# EAGLE board supply LF (EAGLE 9.6.2)
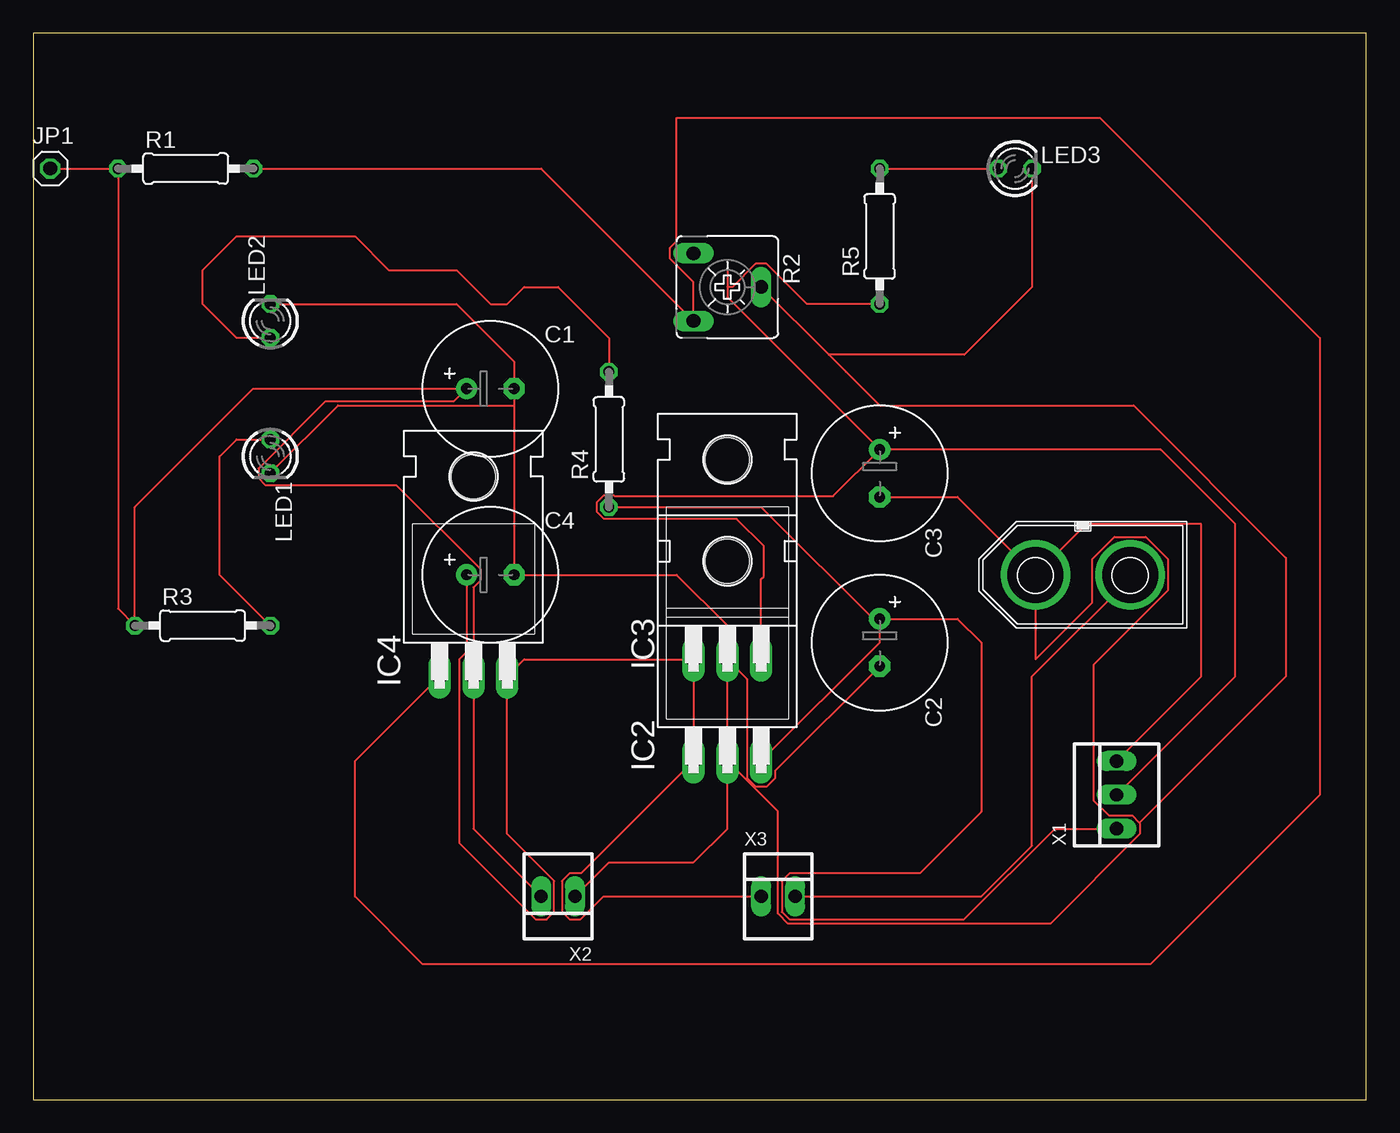
[diagram p0: board, top side]

Size 100 x 80 mm. Coordinates in mm from the lower left corner, seen from the top.
Outline: 0,0 100,0 100,80 0,80 0,0
Copper layers (1*16): Top 0.035mm / dielectric 1.5mm / Bottom 0.035mm
Design rules "default": minimum track width 6mil, minimum drill 0.35mm, track to track 6mil, track to pad 6mil, pad to pad 6mil, via to via 6mil, smd to smd 6mil, copper to edge 40mil, drill to drill 6mil, minimum pad ring 10mil, minimum via ring 8mil, stop-mask expansion 4mil, vias tented up to drill 0mil, thermal gap 10mil

## Footprints (pad centres in the part's own frame; a part is rotated, then mirrored left to right if it is on the bottom)
E3,5-10 = drill 0.813 pad 1.6: + -1.778,0 | drill 0.813 pad 1.6 octagon: - 1.778,0
TO220H = drill 1.118 long: 1 -2.54,-10.16; 2 0,-10.16; 3 2.54,-10.16 | hole 3.302: 0,4.826
1X01 = drill 1.016 octagon: 1 0,0
LED3MM = drill 0.813 octagon: A -1.27,0; K 1.27,0
0207/10 = drill 0.813 octagon: 1 -5.08,0; 2 5.08,0
CA6V = drill 1.016 long: A -2.54,-2.54; E 2.54,-2.54; S 0,2.54
CON-XT60M = drill 4.2: V+ -3.55,0; V- 3.55,0
22-23-2031 = drill 1 long: 1 -2.54,0; 2 0,0; 3 2.54,0
22-23-2021 = drill 1 long: 1 -1.27,0; 2 1.27,0

## Placement (x,y rotation side)
C1  1000uF/16V  [E3,5-10]  34.29,53.34 0 top
C2  1000uF/16V  [E3,5-10]  63.5,34.29 270 top
C3  1000uF/16V  [E3,5-10]  63.5,46.99 270 top
C4  1000uF/16V  [E3,5-10]  34.29,39.37 0 top
IC2  7805T  [TO220H]  52.07,35.56 0 top
IC3  7805T  [TO220H]  52.07,43.18 0 top
IC4  317T  [TO220H]  33.02,41.91 0 top
JP1  [1X01]  1.27,69.85 0 top
LED1  [LED3MM]  17.78,48.26 270 top
LED2  [LED3MM]  17.78,58.42 90 top
LED3  [LED3MM]  73.66,69.85 0 top
R1  1K2  [0207/10]  11.43,69.85 0 top
R2  20K  [CA6V]  52.07,60.96 270 top
R3  1K  [0207/10]  12.7,35.56 0 top
R4  1K  [0207/10]  43.18,49.53 90 top
R5  1K  [0207/10]  63.5,64.77 90 top
VIN  [CON-XT60M]  78.74,39.37 180 top
X1  VSYS  [22-23-2031]  81.28,22.86 90 top
X2  VMOT  [22-23-2021]  39.37,15.24 180 top
X3  switch  [22-23-2021]  55.88,15.24 0 top

## Library data of the parts
C1-C4 R1 R3-R5 = rcl
IC2-IC4 = linear
JP1 = pinhead
LED1-LED3 = led
R2 = pot
VIN = con-XT60M
X1 = con-molex; MF: MOLEX; MPN: 22-23-2031; OC_FARNELL: 1462950; OC_NEWARK: 30C0862
X2 X3 = con-molex; MF: MOLEX; MPN: 22-23-2021; OC_FARNELL: 1462926; OC_NEWARK: 25C3832

## Nets
+12V: C3.+ IC3.3 R5.1 X1.2
GND: C1.- C2.- C3.- C4.- IC2.2 IC3.2 LED1.K LED2.K LED3.K R2.S VIN.V- X1.3 X2.1
N$1: IC4.1 R1.2 R2.E
N$2: LED1.A R3.2
N$3: LED3.A R5.2
N$4: VIN.V+ X3.2
N$5: LED2.A R4.2
VCC: C2.+ IC2.3 R4.1 X1.1
VDD: C1.+ IC4.2 JP1.1 R1.1 R3.1 X2.2
VPP: C4.+ IC2.1 IC3.1 IC4.3 X3.1

## Tracks (layer width: path | path; a pad name or v marks a point on that pad's centre or on a via)
+12V
  Top 0.152: IC3.3 54.61,39.05 54.81,39.25 54.81,41.52 52.77,43.56 42.81,43.56 42.29,44.08 42.29,44.82 42.81,45.34 43.55,45.34 43.62,45.26 59.99,45.26 C3.+ | X1.2 90.17,31.75 90.17,43.18 84.58,48.77 C3.+ | R5.1 60.96,59.69 59.69,59.69 58.04,59.69 55.02,62.71 54.2,62.71 52.45,60.96 52.07,60.96 | 52.07,62.23 52.07,60.96 | 52.07,60.96 52.07,60.2 C3.+
GND
  Top 0.152: LED2.K 31.75,59.69 36.07,55.37 C1.- 36.07,52.07 | 36.07,52.07 C4.- 48.26,39.37 52.07,35.56 IC3.2 | IC2.2 IC3.2 | X2.1 43.18,17.78 49.53,17.78 52.07,20.32 IC2.2 | LED1.K 22.86,52.07 36.07,52.07 | VIN.V- 75.19,33.02 79.45,37.28 79.45,40.55 81.11,42.21 83.47,42.21 85.13,40.55 85.13,38.2 79.54,32.61 79.54,22.45 80.69,21.3 82.44,21.3 82.99,20.76 | C3.- 69.35,45.21 VIN.V- | C2.- 55.68,24.69 55.68,24.12 55.05,23.5 54.17,23.5 53.54,24.12 53.54,31.55 IC3.2 | X1.3 87.63,31.75 87.63,43.18 79,43.18 VIN.V- | 82.99,20.76 83.02,20.73 83.02,19.91 76.3,13.2 56.62,13.2 55.86,13.95 55.86,21.61 IC2.2 | R2.S 59.69,55.88 | 59.69,55.88 60.96,54.61 63.5,52.07 82.55,52.07 93.98,40.64 93.98,31.75 82.99,20.76 | LED3.K 74.93,60.96 69.85,55.88 59.69,55.88
N$1
  Top 0.152: R1.2 38.1,69.85 R2.E 49.53,61.34 47.78,63.09 47.78,63.91 48.26,64.39 48.26,73.66 80.01,73.66 96.52,57.15 96.52,22.86 83.82,10.16 29.21,10.16 24.13,15.24 24.13,25.4 IC4.1
N$2
  Top 0.152: R3.2 13.97,39.37 13.97,48.26 15.24,49.53 LED1.A
N$3
  Top 0.152: R5.2 LED3.A
N$4
  Top 0.152: X3.2 71.12,15.24 74.93,19.05 74.93,31.75 82.55,39.37 VIN.V+
N$5
  Top 0.152: LED2.A 15.24,57.15 12.7,59.69 12.7,62.23 15.24,64.77 24.13,64.77 26.67,62.23 31.75,62.23 34.29,59.69 35.56,59.69 36.83,60.96 39.37,60.96 43.18,57.15 R4.2
VCC
  Top 0.152: IC2.3 63.5,34.29 63.5,35.56 | 63.5,35.56 C2.+ 69.34,36.07 71.12,34.29 71.12,21.59 66.51,16.98 56.74,16.98 56.17,16.4 56.17,14.08 56.74,13.5 69.81,13.5 76.63,20.32 X1.1 | R4.1 54.61,44.45 63.5,35.56
VDD
  Top 0.152: JP1.1 R1.1 6.35,36.83 R3.1 7.62,44.45 16.51,53.34 C1.+ 31.55,52.38 21.91,52.38 16.89,47.36 16.89,46.62 17.41,46.1 27.24,46.1 33.54,39.8 33.54,38.94 33.02,38.42 IC4.2 33.02,20.32 X2.2
VPP
  Top 0.152: X3.1 42.78,15.24 41.05,13.5 40.23,13.5 39.66,14.08 39.66,16.4 40.23,16.98 41.11,16.98 IC2.1 IC3.1 36.83,33.02 IC4.3 35.56,19.92 39.08,16.4 39.08,14.08 38.51,13.5 37.69,13.5 31.95,19.24 31.95,33.03 32.51,33.59 C4.+